# EAGLE board solenoid valve2020 (EAGLE 9.2.2)
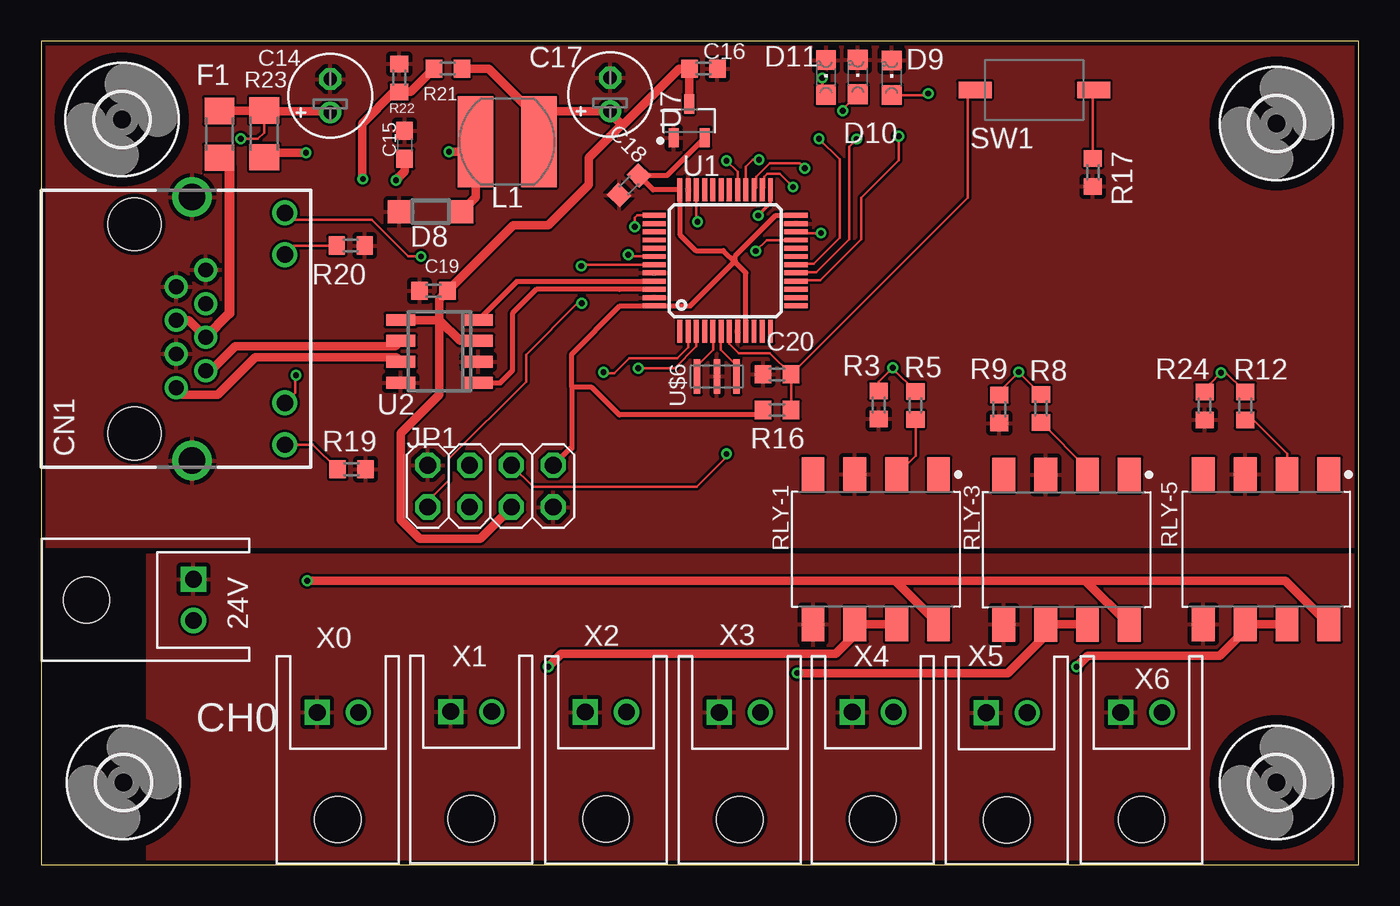
[diagram p0: board, top side]
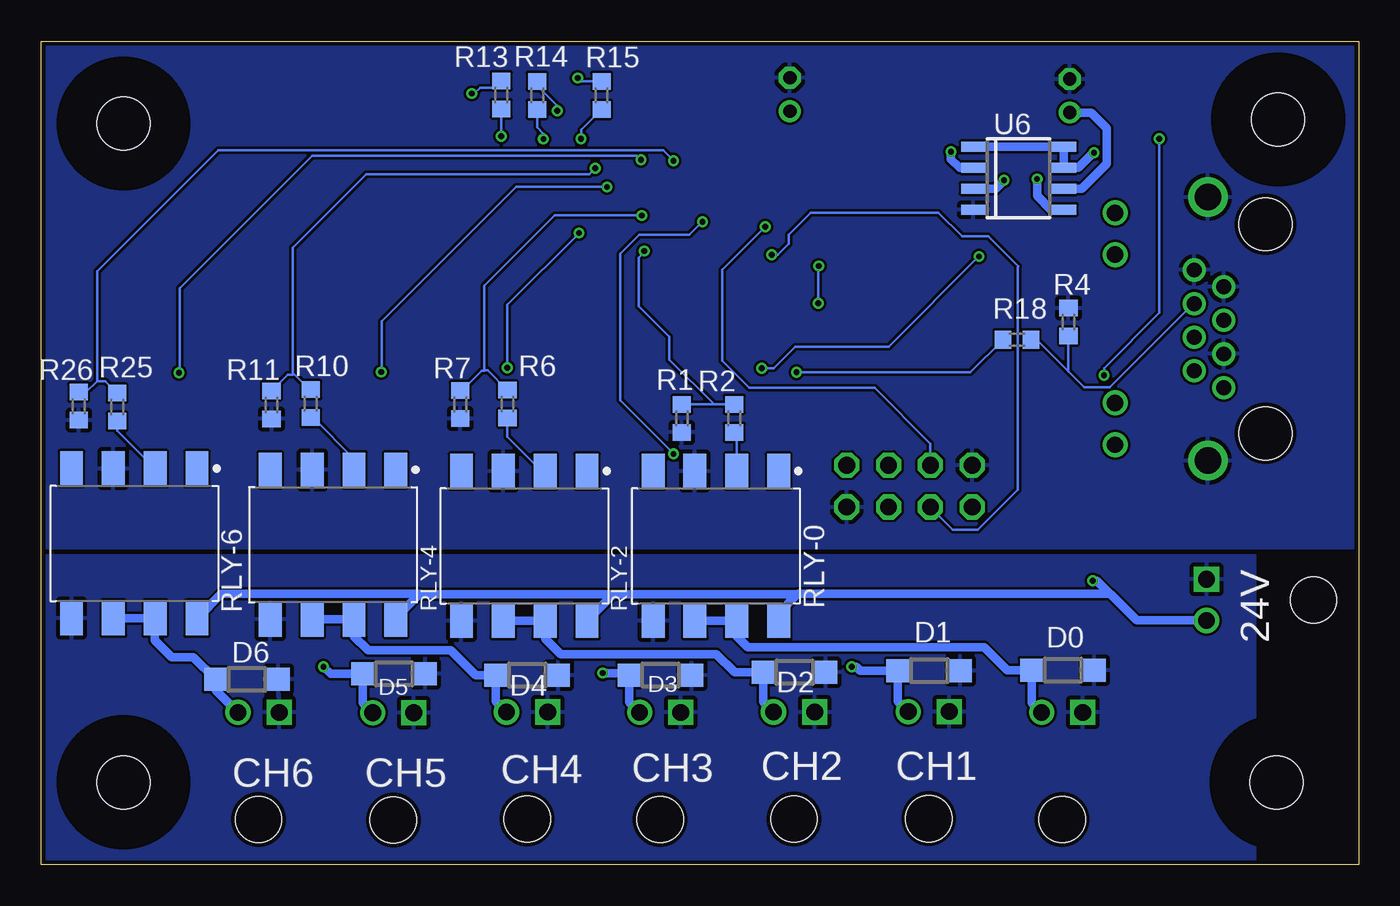
[diagram p1: board, bottom side, seen from below]

Size 80 x 50 mm. Coordinates in mm from the lower left corner, seen from the top.
Outline: 0,0 80,0 80,50 0,50 0,0
Copper layers (1*16): Top 0.035mm / dielectric 1.5mm / Bottom 0.035mm
Design rules "SeeedStudio_2layer_DRU_no_angle_20140221": minimum track width 6mil, minimum drill 12mil, track to track 6mil, track to pad 6mil, pad to pad 6mil, via to via 6mil, smd to smd 0mil, copper to edge 10mil, drill to drill 10mil, minimum pad ring 10mil, minimum via ring 6mil, stop-mask expansion 2mil, vias tented up to drill 100mil, thermal gap 10mil

## Footprints (pad centres in the part's own frame; a part is rotated, then mirrored left to right if it is on the bottom)
S2B-XASK-1 = drill 1.016 square: 1 1.25,0 | drill 1.016: 2 -1.25,0 | hole 2.8: 0,6.5
E2-5 = drill 0.813 pad 1.27: + -1.016,0 | drill 0.813 pad 1.27 octagon: - 1.016,0
C0603 = smd 1.1 x 1: 1 -0.85,0; 2 0.85,0
C0603' = smd 1 x 1.1: 1 -0.85,0; 2 0.85,0
8P8C-LED = drill 0.9 pad 1.3: 1 3.57,-3.81; 2 2.55,-2.03; 3 1.53,-3.81; 4 0.51,-2.03; 5 -0.51,-3.81; 6 -1.53,-2.03; 7 -2.55,-3.81; 8 -3.57,-2.03 | drill 1 pad 1.422: GA 4.5,2.78; GC 7.04,2.78; YA -7.04,2.78; YC -4.5,2.78 | drill 1.6 pad 2.184: M1 -8,-2.85; M2 8,-2.85 | hole 3.2: 6.35,-6.35; -6.35,-6.35
SOD123 = smd 1.4 x 1.4: A 1.9,0; C -1.9,0
CHIPLED_0805 = smd 1.2 x 1.2: A 0,-1.05; C 0,1.05
R1206 = smd 1.6 x 1.803: 1 -1.422,0; 2 1.422,0
2X04 = drill 1.016 octagon: 1 -3.81,-1.27; 2 -3.81,1.27; 3 -1.27,-1.27; 4 -1.27,1.27; 5 1.27,-1.27; 6 1.27,1.27; 7 3.81,-1.27; 8 3.81,1.27
L5852 = smd 2.15 x 5.5: P$1 1.925,0; P$2 -1.925,0
R0603 = smd 1 x 1.1: 1 -0.85,0; 2 0.85,0
SOP254P1016X385-8 = smd 2.09 x 1.389: 1 -4.54,3.81; 2 -4.54,1.27; 3 -4.54,-1.27; 4 -4.54,-3.81; 5 4.54,-3.81; 6 4.54,-1.27; 7 4.54,1.27; 8 4.54,3.81
SWITCH_TACTILE_3X6 = smd 2 x 1: P$1 -3.6,0; P$2 3.6,0
LQFP48 = smd 1.4 x 0.3: 1 -4.3,2.75; 2 -4.3,2.25; 3 -4.3,1.75; 4 -4.3,1.25; 5 -4.3,0.75; 6 -4.3,0.25; 7 -4.3,-0.25; 8 -4.3,-0.75; 9 -4.3,-1.25; 10 -4.3,-1.75; 11 -4.3,-2.25; 12 -4.3,-2.75; 25 4.3,-2.75; 26 4.3,-2.25; 27 4.3,-1.75; 28 4.3,-1.25; 29 4.3,-0.75; 30 4.3,-0.25; 31 4.3,0.25; 32 4.3,0.75; 33 4.3,1.25; 34 4.3,1.75; 35 4.3,2.25; 36 4.3,2.75 | smd 0.3 x 1.4: 13 -2.75,-4.3; 14 -2.25,-4.3; 15 -1.75,-4.3; 16 -1.25,-4.3; 17 -0.75,-4.3; 18 -0.25,-4.3; 19 0.25,-4.3; 20 0.75,-4.3; 21 1.25,-4.3; 22 1.75,-4.3; 23 2.25,-4.3; 24 2.75,-4.3; 37 2.75,4.3; 38 2.25,4.3; 39 1.75,4.3; 40 1.25,4.3; 41 0.75,4.3; 42 0.25,4.3; 43 -0.25,4.3; 44 -0.75,4.3; 45 -1.25,4.3; 46 -1.75,4.3; 47 -2.25,4.3; 48 -2.75,4.3
SO08 = smd 0.72 x 1.78: 1 -1.905,-2.35; 2 -0.635,-2.35; 3 0.635,-2.35; 4 1.905,-2.35; 5 1.905,2.35; 6 0.635,2.35; 7 -0.635,2.35; 8 -1.905,2.35
SOIC8 = smd 0.6 x 1.5: 1 -1.905,-2.75; 2 -0.635,-2.75; 3 0.635,-2.75; 4 1.905,-2.75; 5 1.905,2.75; 6 0.635,2.75; 7 -0.635,2.75; 8 -1.905,2.75
SOT95P240X110-3 = smd 1.18 x 0.609: 1 -1.024,0.95; 2 -1.024,-0.95; 3 1.024,0
3,2 = hole 3.2: 0,0
CSTCE8M00G55 = smd 0.4 x 2.1: 1 -1.2,0; 2 0,0; 3 1.2,0

## Placement (x,y rotation side)
24V  [S2B-XASK-1]  9.25,16.08 90 top
C14  22u  [E2-5]  17.55,46.69 90 top
C15  220p  [C0603]  22.07,43.71 90 top
C16  100n  [C0603']  40.21,48.34 0 top
C17  22u  [E2-5]  34.54,46.76 90 top
C18  100n  [C0603']  35.69,41.25 225 top
C19  100n  [C0603']  23.83,34.85 0 top
C20  100n  [C0603']  44.68,29.77 0 top
CN1  8P8C-LED  [8P8C-LED]  12.01,32.54 270 top
D0  [SOD123]  17.96,11.81 0 bottom
D1  [SOD123]  26.09,11.79 0 bottom
D2  [SOD123]  34.26,11.68 0 bottom
D3  [SOD123]  42.39,11.51 0 bottom
D4  [SOD123]  50.5,11.51 0 bottom
D5  [SOD123]  58.57,11.58 0 bottom
D6  [SOD123]  67.51,11.25 0 bottom
D8  [SOD123]  23.65,39.65 180 top
D9  [CHIPLED_0805]  51.64,47.78 0 top
D10  [CHIPLED_0805]  49.58,47.83 0 top
D11  [CHIPLED_0805]  47.65,47.8 0 top
F1  [R1206]  10.82,44.35 270 top
JP1  [2X04]  27.28,22.99 0 top
L1  220u  [L5852]  28.3,43.89 180 top
R1  10k  [R0603]  41.1,27.1 270 bottom
R2  100R  [R0603]  37.92,27.1 270 bottom
R3  10k  [R0603]  50.85,27.91 270 top
R4  100k  [R0603]  17.63,32.94 90 bottom
R5  100R  [R0603]  53.09,27.89 270 top
R6  100R  [R0603]  51.69,27.97 270 bottom
R7  10k  [R0603]  54.56,27.94 270 bottom
R8  100R  [R0603]  60.71,27.71 270 top
R9  10k  [R0603]  58.17,27.66 270 top
R10  100R  [R0603]  63.63,27.99 270 bottom
R11  10k  [R0603]  66.01,27.91 270 bottom
R12  100R  [R0603]  73.1,27.86 270 top
R13  1k  [R0603]  52.07,46.74 90 bottom
R14  1k  [R0603]  49.89,46.71 90 bottom
R15  1k  [R0603]  45.97,46.71 90 bottom
R16  10k  [R0603]  44.68,27.61 0 top
R17  100R  [R0603]  63.86,42.04 270 top
R18  1k  [R0603]  20.75,31.88 0 bottom
R19  4k7  [R0603]  18.85,24 180 top
R20  1k  [R0603]  18.8,37.59 180 top
R21  3.6k  [R0603]  24.69,48.34 0 top
R22  1.2k  [R0603]  21.74,47.78 270 top
R23  0.68  [R1206]  13.54,44.37 270 top
R24  10k  [R0603]  70.64,27.86 270 top
R25  100R  [R0603]  75.39,27.79 270 bottom
R26  10k  [R0603]  77.72,27.84 270 bottom
RLY-0  PHOTORELAY  [SOP254P1016X385-8]  39.04,19.35 270 bottom
RLY-1  PHOTORELAY  [SOP254P1016X385-8]  50.67,19.15 270 top
RLY-2  PHOTORELAY  [SOP254P1016X385-8]  50.67,19.35 270 bottom
RLY-3  PHOTORELAY  [SOP254P1016X385-8]  62.26,19.13 270 top
RLY-4  PHOTORELAY  [SOP254P1016X385-8]  62.28,19.43 270 bottom
RLY-5  PHOTORELAY  [SOP254P1016X385-8]  74.37,19.15 270 top
RLY-6  PHOTORELAY  [SOP254P1016X385-8]  74.35,19.51 270 bottom
SW1  SWITCH_TACTILETOP  [SWITCH_TACTILE_3X6]  60.3,47.04 180 top
U1  STM32F103C8  [LQFP48]  41.53,36.68 90 top
U2  NCV7351D1E  [SO08]  24.18,31.17 90 top
U6  MC34063AD  [SOIC8]  20.65,41.68 270 bottom
U7  XC6206  [SOT95P240X110-3]  39.34,45.16 90 top
U$1  [3,2]  5,5 0 top
U$2  [3,2]  4.9,45.24 0 top
U$3  [3,2]  75,45 0 top
U$4  [3,2]  75,5 0 top
U$6  CSTCE8M00G55  [CSTCE8M00G55]  41.02,29.64 0 top
X0  [S2B-XASK-1]  18.01,9.25 180 top
X1  [S2B-XASK-1]  26.11,9.3 180 top
X2  [S2B-XASK-1]  34.29,9.27 180 top
X3  [S2B-XASK-1]  42.42,9.25 180 top
X4  [S2B-XASK-1]  50.5,9.27 180 top
X5  [S2B-XASK-1]  58.62,9.22 180 top
X6  [S2B-XASK-1]  66.8,9.25 180 top

## Library data of the parts
24V X0 X1-X6 = jst-xa
C14 C16-C20 R13-R17 = rcl
C15 = rcl; SPICEPREFIX: C
CN1 = con-rj45; OC_FARNELL: unknown; OC_NEWARK: unknown
D0 D1-D6 D8 = diode
D9-D11 = led
F1 R1-R12 R18-R26 = rcl; SPICEPREFIX: R
JP1 = pinhead
L1 = l_ysk
RLY-0 RLY-1-RLY-6 = opto-coupler
SW1 = switch-tactile
U1 = stm32_mcu
U2 = on-semi
U6 = mc34063
U7 = torex
U$1-U$4 = holes
U$6 = resonator

## Nets
!EMS: R18.1 U1.2
!RESET: C20.2 R16.2 SW1.P$2 U1.7
+3V3: C18.1 JP1.8 R16.1 U1.9 U1.24 U1.36 U1.48 U7.2
+5V: C16.1 C17.+ C19.2 JP1.5 L1.P$2 R21.2 U2.3 U2.5 U7.3
+24V: C14.+ CN1.GA F1.1 R23.1 U6.6
CANH: CN1.1 U2.7
CANL: CN1.2 U2.6
CANRX: U1.45 U2.4
CANTX: U1.46 U2.1
GND: 24V.1 D0.A D1.A D2.A D3.A D4.A D5.A D6.A RLY-0.5 RLY-1.5 RLY-2.5 RLY-3.5 RLY-4.5 RLY-5.5 RLY-6.5 X0.1 X1.1 X2.1 X3.1 X4.1 X5.1 X6.1
GNDIO: C14.- C15.2 C16.2 C17.- C18.2 C19.1 C20.1 CN1.3 CN1.7 CN1.8 CN1.M1 CN1.M2 D8.A D9.C D10.C D11.C JP1.2 JP1.7 R1.2 R3.2 R4.2 R7.2 R9.2 R11.2 R17.2 R19.1 R20.1 R22.1 R24.2 R26.2 RLY-0.3 RLY-1.3 RLY-2.3 RLY-3.3 RLY-4.3 RLY-5.3 RLY-6.3 U1.8 U1.23 U1.35 U1.44 U1.47 U2.2 U2.8 U6.4 U7.1 U$6.2
LED0: R13.1 U1.16
LED1: R14.1 U1.17
LED2: R15.1 U1.18
LED_CAN: CN1.YA U1.3
N$1: D1.C RLY-1.6 RLY-1.7 X1.2
N$2: R5.2 RLY-1.2
N$3: D0.C RLY-0.6 RLY-0.7 X0.2
N$5: D2.C RLY-2.6 RLY-2.7 X2.2
N$6: R2.2 RLY-0.2
N$8: R6.2 RLY-2.2
N$9: D10.A R14.2
N$10: D9.A R13.2
N$11: U1.6 U$6.3
N$12: CN1.4 CN1.5 F1.2
N$13: R23.2 U6.1 U6.7 U6.8
N$14: D8.C L1.P$1 U6.2
N$15: C15.1 U6.3
N$16: R17.1 SW1.P$1
N$17: R21.1 R22.2 U6.5
N$18: CN1.YC R20.2
N$19: U1.5 U$6.1
N$21: D11.A R15.2
N$22: CN1.GC R19.2
N$23: D3.C RLY-3.6 RLY-3.7 X3.2
N$24: R8.2 RLY-3.2
N$26: D4.C RLY-4.6 RLY-4.7 X4.2
N$27: R10.2 RLY-4.2
N$29: D5.C RLY-5.6 RLY-5.7 X5.2
N$30: R12.2 RLY-5.2
N$32: D6.C RLY-6.6 RLY-6.7 X6.2
N$33: R25.2 RLY-6.2
N$38: CN1.6 R4.1 R18.2
SOLV0: R1.1 R2.1 U1.21
SOLV1: R3.1 R5.1 U1.22
SOLV2: R6.1 R7.1 U1.25
SOLV3: R8.1 R9.1 U1.26
SOLV4: R10.1 R11.1 U1.27
SOLV5: R12.1 R24.1 U1.28
SOLV6: R25.1 R26.1 U1.29
SOLV7: U1.30
SOLV8: U1.41
SWCLK: JP1.4 U1.37
SWDIO: JP1.6 U1.34
UART_RX: JP1.1 U1.43
UART_TX: JP1.3 U1.42
VCC: 24V.2 RLY-0.8 RLY-1.8 RLY-2.8 RLY-3.8 RLY-4.8 RLY-5.8 RLY-6.8

## Tracks (layer width: path | path; a pad name or v marks a point on that pad's centre or on a via)
!EMS  (via drill 0.35)
  Top 0.152: v34.14,29.9 34.19,29.84 34.8,29.84 35.71,30.76 38.63,30.76 39.28,31.41 U1.2
  Bottom 0.152: v34.14,29.9 23.58,29.9 R18.1
!RESET
  Top 0.152: U1.7 41.78,31.64 42.35,31.07 44.23,31.07 C20.2 | C20.2 R16.2 | SW1.P$2 56.24,46.58 56.24,40.48 C20.2
+3V3
  Top 0.305: 42.14,36.57 41.42,37.29 39.74,37.29 38.77,38.26 U1.36 37.16,40.98 C18.1 38.01,41.85 U7.2 | 42.14,36.57 42.78,35.94 U1.9 | 42.14,36.66 39.41,33.93 U1.48 35.14,33.93 32.22,31.01 32.22,28.98 | 42.14,36.57 42.14,36.66 | 42.14,36.66 42.14,36.96 44.61,39.43 U1.24 | 32.22,28.98 33.43,28.98 35.1,27.3 43.52,27.3 R16.1 | 32.22,28.98 32.22,25.28 32.12,25.28 JP1.8
+5V
  Top 0.508: R21.2 27.16,48.34 30.22,45.28 L1.P$2 30.22,45.74 C17.+ 34.54,45.61 35.24,44.91 | U2.5 24.17,33.07 | 24.17,33.07 24.17,34.34 C19.2 28.66,38.84 30.8,38.84 33.25,41.29 33.25,42.93 35.24,44.91 | 24.17,33.07 24.16,33.08 24.16,28.53 21.82,26.19 21.82,20.95 22.99,19.79 26.67,19.79 28.55,21.67 JP1.5 | 24.17,33.07 25.44,31.8 U2.3 | 35.24,44.91 35.27,44.88 38.73,48.34 C16.1 39.36,46.2 U7.3
+24V  (via drill 0.35)
  Top 0.152: R23.1 13.54,44.45 13.16,44.07 v12.12,44.07 | v15.47,29.72 15.42,29.72 15.42,28.66 CN1.GA
  Top 0.508: F1.1 13.51,45.77 R23.1 13.59,45.74 17.48,45.74 C14.+
  Bottom 0.152: v12.12,44.07 12.12,33.5 15.47,30.15 v15.47,29.72
  Bottom 0.508: U6.6 16.81,41.05 15.3,42.56 15.3,44.71 16.26,45.67 C14.+
CANH
  Top 0.508: U2.7 21.55,30.81 12.99,30.81 10.73,28.55 8.62,28.55 CN1.1
CANL
  Top 0.508: CN1.2 10.29,29.99 11.77,31.47 21.5,31.47 U2.6
CANRX
  Top 0.305: U1.45 37.2,35.4 28.86,35.4 U2.4
CANTX
  Top 0.305: U1.46 35.1,34.93 30.06,34.93 28.61,33.48 28.61,30 27.88,29.26 U2.1
GND
  pour Top: 6.43,0.28 6.43,18.82 80.16,18.82 80.16,0.28
  pour Bottom: 6.3,0.1 6.3,18.8 80.03,18.8 80.03,0.1
GNDIO
  pour Top: -0.2,49.91 -0.2,19.3 80.06,19.3 80.06,49.91
  pour Bottom: -0.2,49.89 -0.2,19.23 80.01,19.23 80.01,49.89
LED0  (via drill 0.35)
  Top 0.152: v52.06,44.23 52.06,42.76 49.8,40.5 49.8,37.96 47.31,35.47 45.87,35.47 U1.16
  Bottom 0.152: R13.1 52.06,45.88 v52.06,44.23
LED1  (via drill 0.35)
  Top 0.152: U1.17 45.87,35.97 47.05,35.97 49.05,37.97 49.05,43.6 v49.51,44.06
  Bottom 0.152: R14.1 49.89,44.77 49.51,44.39 v49.51,44.06
LED2  (via drill 0.35)
  Top 0.152: U1.18 45.87,36.47 46.9,36.47 48.48,38.05 48.48,42.82 v47.22,44.08
  Bottom 0.152: R15.1 47.22,44.62 v47.22,44.08
LED_CAN  (via drill 0.35)
  Top 0.152: CN1.YA 15.23,39.15 20.08,39.15 22.3,36.93 v23.06,36.93 | U1.3 39.78,31.46 38.47,30.15 v36.25,30.15
  Bottom 0.152: v23.06,36.93 28.55,31.44 34.22,31.44 35.51,30.15 v36.25,30.15
N$1  (via drill 0.35)
  Top 0.508: v30.79,12.01 31.57,12.8 48.25,12.8 49.4,13.95 RLY-1.6 RLY-1.7
  Bottom 0.508: v30.79,12.01 30.5,12.01 30.28,11.79 D1.C 27.99,9.92 X1.2
N$2
  Top 0.152: R5.2 53.09,24.84 RLY-1.2
N$3
  Bottom 0.508: RLY-0.6 RLY-0.7 37.77,13.88 37.11,13.21 22.75,13.21 21.34,11.81 D0.C 19.86,9.85 X0.2
N$5
  Bottom 0.508: RLY-2.6 RLY-2.7 49.4,13.72 48.46,12.78 39,12.78 37.9,11.68 D2.C 36.16,9.9 X2.2
N$6
  Bottom 0.152: R2.2 37.77,26.1 RLY-0.2
N$8
  Bottom 0.152: R6.2 51.69,25.98 49.61,23.89 RLY-2.2
N$9  (via drill 0.35)
  Top 0.152: D10.A 48.67,45.86 v48.67,45.78
  Bottom 0.152: R14.2 49.89,47.31 48.67,46.09 v48.67,45.78
N$10  (via drill 0.35)
  Top 0.152: D9.A 53.78,46.73 53.85,46.8 v53.85,46.83
  Bottom 0.152: R13.2 52.07,47.19 53.34,47.19 53.7,46.83 v53.85,46.83
N$11
  Top 0.152: U$6.3 42.22,30.3 41.25,31.27 41.25,32.35 U1.6
N$12
  Top 0.508: CN1.4 8.96,33.05 CN1.5
  Top 0.61: F1.2 11.43,42.32 11.43,33.47 CN1.4
N$13  (via drill 0.35)
  Top 0.508: R23.2 13.82,43.23 v16.08,43.23
  Bottom 0.508: v16.08,43.23 16.12,43.23 17.04,42.32 U6.7 U6.8 U6.1
N$14  (via drill 0.35)
  Top 0.508: v24.77,43.28 25.76,43.28 L1.P$1 26.37,40.52 25.55,39.7 D8.C
  Bottom 0.508: v24.77,43.28 24.77,42.84 24.24,42.32 U6.2
N$15  (via drill 0.35)
  Top 0.508: C15.1 22.07,42.09 v21.54,41.55
  Bottom 0.508: U6.3 22.05,41.05 v21.54,41.55
N$16
  Top 0.152: R17.1 63.86,47 SW1.P$1
N$17  (via drill 0.35)
  Top 0.508: R21.1 22.43,46.93 R22.2 21.41,46.93 19.48,45 19.48,41.68 v19.53,41.63
  Bottom 0.508: U6.5 18.69,39.78 19.53,40.62 v19.53,41.63
N$18
  Top 0.152: CN1.YC 15.35,37.59 R20.2
N$19
  Top 0.152: U$6.1 39.82,30.3 40.79,31.27 40.79,32.36 U1.5
N$21  (via drill 0.35)
  Top 0.152: v47.42,47.76 47.42,46.99 D11.A
  Bottom 0.152: v47.42,47.76 47.21,47.56 R15.2
N$22
  Top 0.152: R19.2 16.5,25.5 CN1.GC
N$23  (via drill 0.35)
  Top 0.508: RLY-3.7 RLY-3.6 60.98,13.93 58.69,11.63 v45.9,11.63
  Bottom 0.508: v45.9,11.63 44.42,11.63 D3.C 44.29,9.87 X3.2
N$24
  Top 0.152: R8.2 63.52,24.04 RLY-3.2
N$26
  Bottom 0.508: RLY-4.6 RLY-4.7 61.01,13.88 60.15,13.01 55.13,13.01 53.62,11.51 D4.C 52.4,9.92 X4.2
N$27
  Bottom 0.152: R10.2 63.49,27.14 61.01,24.66 RLY-4.2
N$29  (via drill 0.35)
  Top 0.508: v62.87,12.01 63.53,12.68 71.55,12.68 73.1,14.23 RLY-5.6 RLY-5.7
  Bottom 0.508: v62.87,12.01 62.43,11.58 D5.C 60.47,9.82 X5.2
N$30
  Top 0.152: RLY-5.2 75.64,24.96 73.59,27.01 R12.2
N$32
  Bottom 0.152: 73.1,14.97 RLY-6.7
  Bottom 0.508: 73.1,14.97 73.1,13.62 72.08,12.6 70.76,12.6 D6.C 69.41,10.61 X6.2 | RLY-6.7 RLY-6.6
N$33
  Bottom 0.152: R25.2 75.39,26.36 RLY-6.2
N$38
  Bottom 0.152: CN1.6 10.06,34.07 15.13,29 16.68,29 17.63,29.95 | R18.2 19.56,31.88 17.63,29.95 | R4.1 17.63,29.95
SOLV0  (via drill 0.35)
  Top 0.152: U1.21 44.05,37.93 v43.38,37.26
  Bottom 0.152: v43.38,37.26 43.38,37.19 43.71,36.85 43.71,33.91 41.86,32.06 41.86,30.67 39.14,27.95 | R1.1 39.14,27.95 | R2.1 39.14,27.95
SOLV1  (via drill 0.35)
  Top 0.152: R5.1 51.7,30.12 v51.7,30.18 50.85,29.32 R3.1 | v47.34,38.35 45.89,38.35 45.83,38.41 U1.22
  Bottom 0.152: v51.7,30.18 51.7,33.99 v47.34,38.35
SOLV2  (via drill 0.35)
  Top 0.152: 44.28,40.88 U1.25
  Top 0.203: v43.54,39.42 44.28,40.16 44.28,40.88
  Bottom 0.152: R6.1 52.88,30.01 53.09,30.01 | v43.54,39.42 48.82,39.42 53.09,35.15 53.09,30.01 | 53.09,30.01 53.09,29.98 53.26,29.98 54.46,28.79 R7.1
SOLV3  (via drill 0.35)
  Top 0.152: R8.1 60.68,28.56 59.36,29.88 v59.36,29.91 58.17,28.72 R9.1 | v45.64,41.15 44.84,41.96 44.09,41.96 43.9,41.77 43.9,41.1 U1.26
  Bottom 0.152: v59.36,29.91 59.31,29.96 59.31,33.01 51.17,41.15 v45.64,41.15
SOLV4  (via drill 0.35)
  Top 0.152: v46.35,42.29 46.05,42.6 44.22,42.6 43.4,41.77 43.4,41.1 U1.27
  Bottom 0.152: v46.35,42.29 46.71,41.94 60.25,41.94 64.72,37.47 64.72,29.86 | 64.72,29.86 63.7,28.84 R10.1 | 64.72,29.86 64.72,29.75 65.02,29.75 R11.1
SOLV5  (via drill 0.35)
  Top 0.152: v43.59,42.8 43.19,42.8 42.78,42.39 U1.28 | R24.1 70.94,29.02 70.94,29.18 v71.63,29.87 71.73,29.97 71.84,29.97 R12.1
  Bottom 0.152: v43.59,42.8 43.84,43.05 63.53,43.05 71.58,35.01 71.58,29.92 v71.63,29.87
SOLV6  (via drill 0.35)
  Top 0.152: v41.6,42.75 42.28,42.07 U1.29
  Bottom 0.152: v41.6,42.75 42.24,43.38 69.24,43.38 76.61,36.02 76.61,29.36 | 76.61,29.36 76.11,29.36 R25.1 | R26.1 77.28,28.69 76.61,29.36
SWCLK  (via drill 0.35)
  Top 0.152: v36.04,38.73 36.04,39.27 36.2,39.43 U1.37
  Bottom 0.152: v36.04,38.73 38.66,36.12 38.66,30.61 37.01,28.96 29.4,28.96 26.01,25.57 JP1.4
SWDIO  (via drill 0.35)
  Top 0.152: U1.34 39.78,39.12 v39.85,39.04 | v41.6,24.94 41.6,24.74 39.8,22.94 29.87,22.94 JP1.6
  Bottom 0.152: v39.85,39.04 40.64,38.25 43.69,38.25 44.86,37.08 44.86,28.19 v41.6,24.94
UART_RX  (via drill 0.35)
  Top 0.152: U1.43 32.85,36.43 32.79,36.37 v32.79,36.35 | v32.82,34.09 32.56,34.09 29.44,30.96 29.44,29.34 24.74,24.64 24.74,23.34 23.47,22.07 JP1.1
  Bottom 0.152: v32.79,36.35 32.82,36.32 v32.82,34.09
UART_TX  (via drill 0.35)
  Top 0.152: v35.64,37.03 35.76,37.03 35.87,36.93 U1.42
  Bottom 0.152: v35.64,37.03 35.28,37.03 34.62,37.69 34.62,38.25 33.28,39.59 25.53,39.59 24.09,38.16 22.51,38.16 20.68,36.32 20.72,36.28 20.72,22.76 23.14,20.34 24.66,20.34 26.01,21.69 JP1.3
VCC  (via drill 0.35)
  Top 0.508: v16.15,17.25 51.85,17.25 | 51.85,17.25 RLY-1.8 | 51.85,17.25 63.41,17.25 | 63.41,17.25 75.55,17.25 RLY-5.8 | 63.41,17.25 RLY-3.8
  Bottom 0.508: v16.15,17.25 15.93,17.25 15.13,16.45 | 15.13,16.45 15.1,16.42 15.07,16.42 13.48,14.83 24V.2 | 15.13,16.45 34.06,16.45 34.09,16.42 | 34.09,16.42 45.26,16.42 | 45.26,16.42 RLY-2.8 | 45.26,16.42 57.04,16.42 | RLY-4.8 58.47,14.99 57.04,16.42 | 57.04,16.42 57.02,16.45 69.06,16.45 RLY-6.8 | RLY-0.8 35.23,15.28 34.09,16.42

## Text on the board
tPlace: CH0
bPlace: 24V | CH1 | CH2 | CH3 | CH4 | CH5 | CH6